# Altium PCB MainBoard.PcbDoc
Units mil, origin at the board's own origin, x right, y up, seen from the top; angles counter-clockwise.
Board outline 1113.19 x 925.2 mil, 2 copper layers (Top1, Bottom4), stack 46.457 mil thick; 29 components, 50 nets, 196 pads, 117 vias.
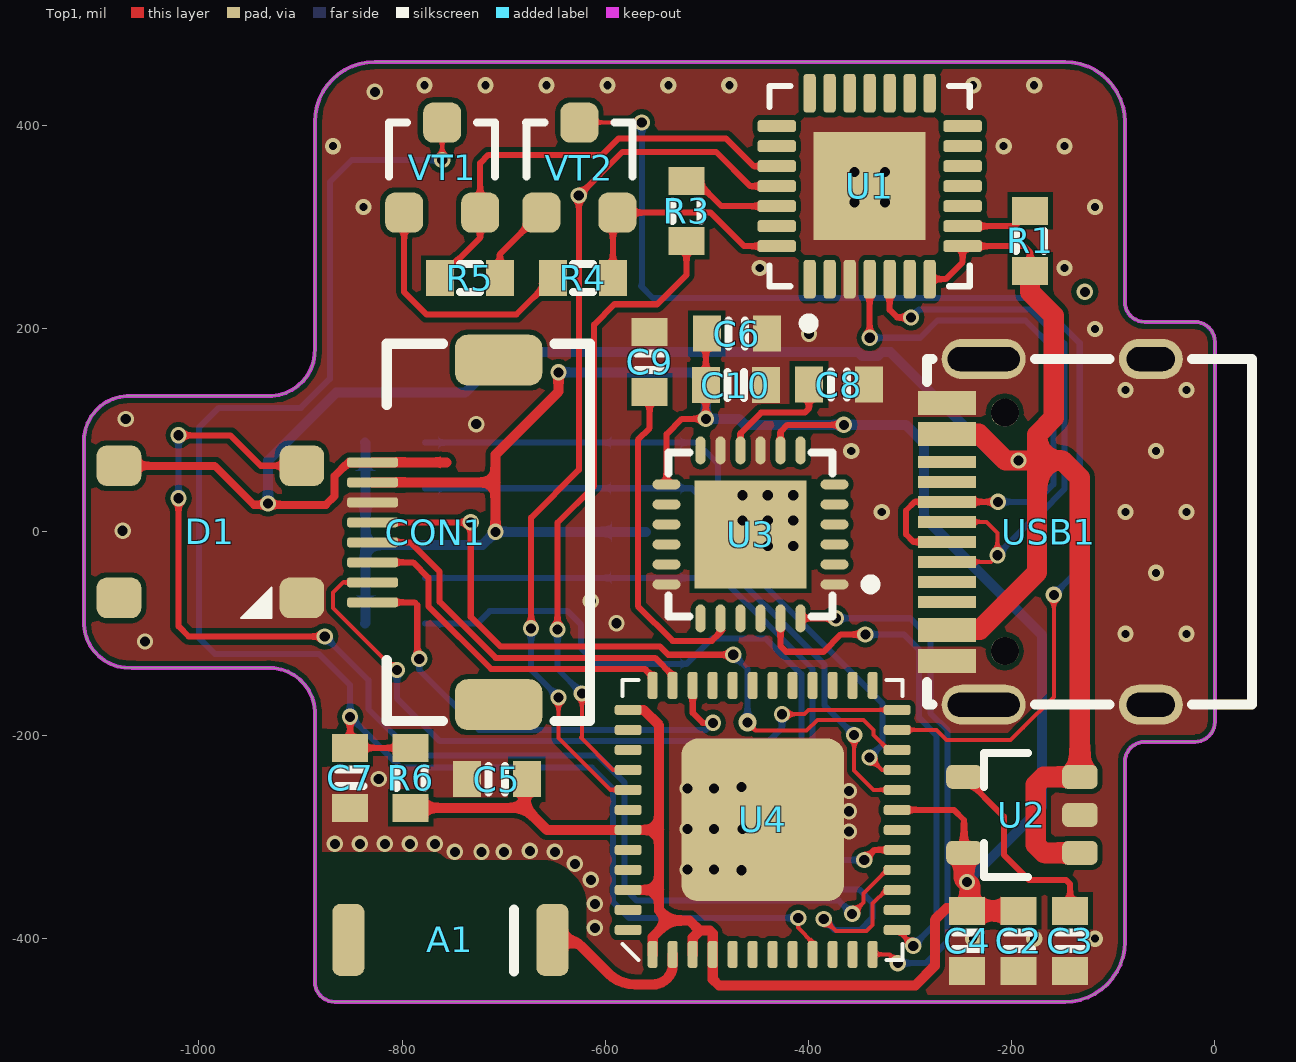
[diagram p0: Top1 view]
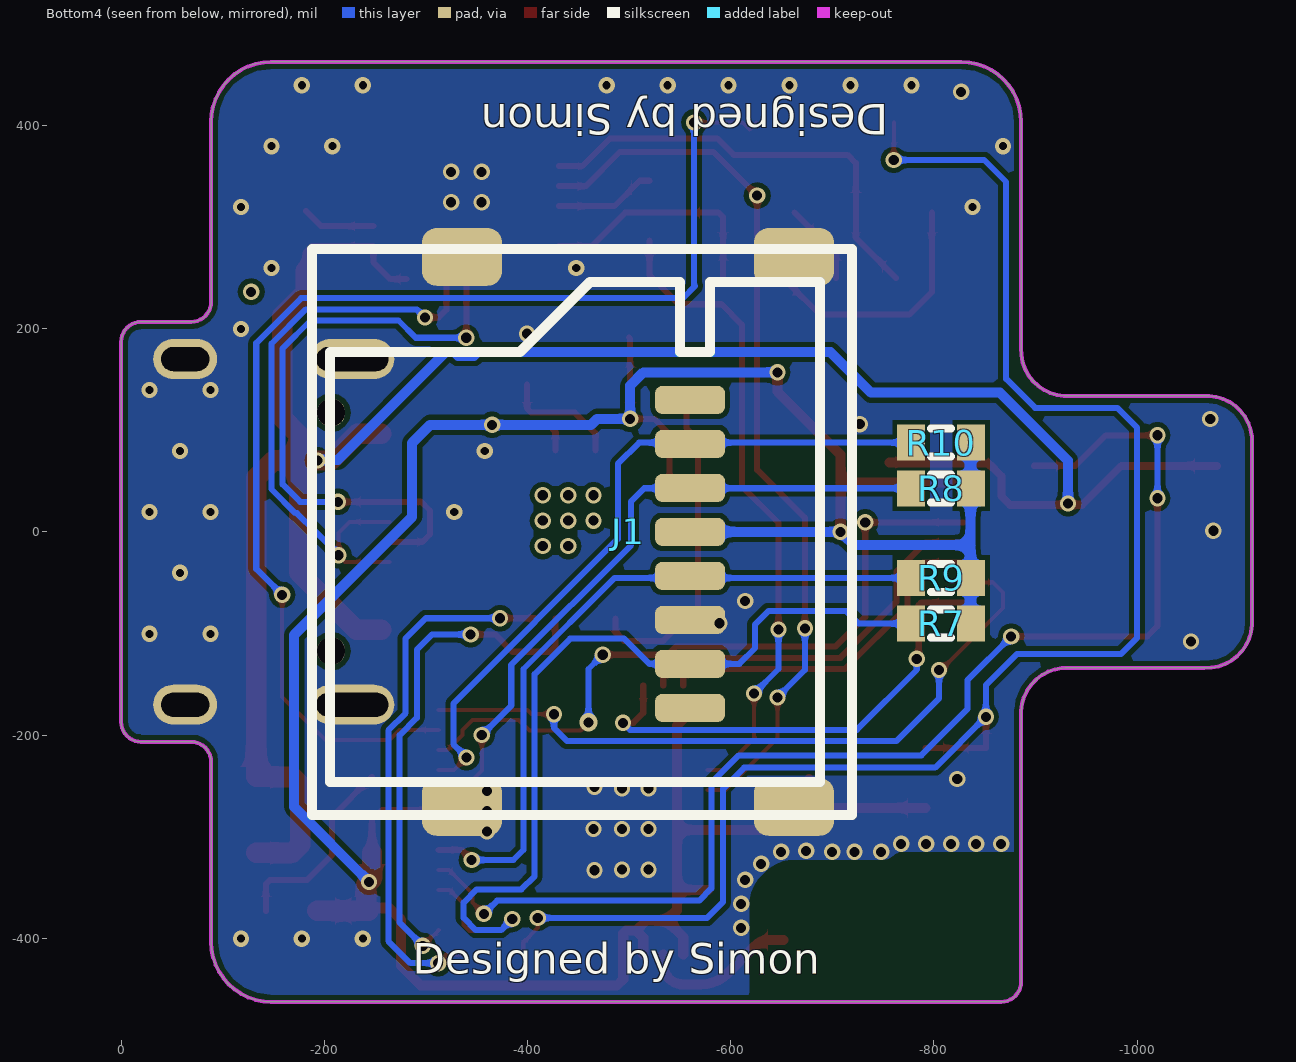
[diagram p1: Bottom4 view, seen from below]

## Layer stack, top to bottom
Top Solder: solder mask 0.3937, Solder Resist, Dk 3.5
Top1: signal copper 1.5748
Dielectric 2: core 43.3071, PP-006, Dk 4.2
Bottom4: signal copper 1.5748
Bottom Solder: solder mask 0.3937, Solder Resist, Dk 3.5

## Board outline
-933.07,-133.86 cw(c-930.61,-178.64) -885.83,-176.18 -885.83,-442.91 ccw(c-866.14,-442.91) -866.14,-462.6 -147.64,-462.6 ccw(c-147.64,-403.54) -88.58,-403.54 -88.58,-226.38 cw(c-68.9,-226.38) -68.9,-206.69 -19.68,-206.69 ccw(c-19.68,-187.01) 0,-187.01 0,187.01 ccw(c-19.68,187.01) -19.68,206.69 -68.9,206.69 cw(c-68.9,226.38) -88.58,226.38 -88.58,403.54 ccw(c-147.64,403.54) -147.64,462.6 -826.77,462.6 ccw(c-826.77,403.54) -885.83,403.54 -885.83,182.09 -885.83,181.1 cw(c-930.61,178.64) -928.15,133.86 -1070.87,133.86 ccw(c-1068.41,89.07) -1113.19,86.61 -1113.19,-91.54 ccw(c-1068.41,-89.07) -1065.94,-133.86

## Design rules (kind name [scope] priority, off if disabled: settings)
Clearance [All] p1: gap=5 ignorepadtopadclearanceinfootprint=FALSE
ComponentClearance [All] p1: gap=0 collisioncheckmode=3 verticalgap=0 showdistances=FALSE
DiffPairsRouting [All] p1: maxlimit=9 minlimit=9 mostfreqgap=9 toplayer_minwidth=4 toplayer_maxwidth=4 toplayer_prefwidth=4 bottomlayer_minwidth=4 bottomlayer_maxwidth=4 bottomlayer_prefwidth=4 maxuncoupledlength=500
FanoutControl Fanout_BGA [All] p1: bgadir=Out bgaviamode=Centered fanoutstyle=Auto fanoutdirection=Alternating viagrid=1 // Fanout_BGA (Default Rule)
HoleSize [All] p1: absolutevalues=TRUE maxlimit=10000 minlimit=8 maxpercent=80.000 minpercent=20.000
MinimumSolderMaskSliver [All] p1 off: minsoldermaskwidth=2
PlaneClearance [All] p1: clearance=8
PlaneConnect [All] p1: planeconnectstyle=Direct reliefexpansion=20 reliefentries=4 reliefconductorwidth=10 reliefairgap=10
PolygonConnect [All] p1: connectstyle=Direct reliefconductorwidth=10 reliefentries=4 polygonreliefangle="90 Angle" airgapwidth=10
RoutingVias [All] p1: holewidth=8 width=16 viastyle="Through Hole" minholewidth=6 minwidth=12 maxholewidth=28 maxwidth=50
SilkToBoardRegionClearance [All] p1 off:
SilkToSilkClearance [All] p1: silktosilkclearance=0
SilkToSolderMaskClearance [IsPad] p1: minsilkscreentomaskgap=0 clearancetoexposedcopper=TRUE
SolderMaskExpansion [All] p1: expansion=3 istentingtop=FALSE
Width [All] p1: maxlimit=10000 minlimit=4 preferedwidth=6
20 further rules are at their usual default settings.

## Components (designator, comment, footprint, x,y, rotation, side; value= is the part's Value field where it differs from the comment)
A1 "RAINSUN" ANT-Rainsun-AN5120 -751.97,-401.57 r180 top
C2 "10uF" CAP_0603 -208.17,-402.56 r90 top
C3 "10uF" CAP_0603 -157.48,-402.56 r90 top
C4 "10uF" CAP_0603 -258.86,-402.56 r90 top
C5 "0.1uF" CAP_0603 -706.69,-228.35 r0 top
C6 "103" CAP_0603 -470.47,180.18 r180 top
C7 "1uF" CAP_0603 -866.14,-242.13 r90 top
C8 "104" CAP_0603 -370,160 r0 top
C9 "2.2nF" CAP_0603 -541.34,167.32 r270 top
C10 "104" CAP_0603 -471.46,159.51 r0 top
CON1 "FFC_0.5_8" FFC_0.5_8 -740,-0.5 r90 top locked
D1 "RGB" LED_5050_WS2812B -988.62,0.04 r0 top locked
J1 "TF-Socket" TF_F -560,0 r90 bottom locked
R1 "10K" RES_0603 -196.85,286.42 r90 top
R3 "200R" RES_0603 -535,316 r90 top
R4 "12K" RES_0603 -622.05,234.76 r180 top
R5 "12K" RES_0603 -733.27,264.76 r0 top
R6 "10K" RES_0603 -776.57,-242.13 r270 top
R7 "10K" RES_0603 -807.09,-105.31 r0 bottom
R8 "10K" RES_0603 -807.09,27.87 r0 bottom
R9 "10K" RES_0603 -807.09,-60.35 r0 bottom
R10 "10K" RES_0603 -807.09,72.83 r0 bottom
U1 "CP2102" QFN-28 -339.73,340.26 r90 top value=Value
U2 "ME6211C33" SOT23-5 -191.93,-278.54 r180 top
U3 "MPU6050" QFN-24 -457,-2.5 r180 top
U4 "ESP32_SIP" QFN-48_7X7 -445,-283.5 r90 top locked
USB1 "Type-C" TypeC-304-16BCP -227.56,170.08 r90 top locked
VT1 "S8050" SMT_TRIODE_NPN -760.5,358.5 r0 top
VT2 "S8050" SMT_TRIODE_NPN -625.5,358.5 r0 top

## Footprints (in the part's own frame and the unit in brackets; to place one, negate y for a bottom-side part, rotate by r counter-clockwise, add the part's x,y. Pads: shape width x height; smd on the part's side, far side on the other; paste and mask are expansions set on the pad)
ANT-Rainsun-AN5120 [mm] "选择焊盘"
  rrect50% 0.8x1.8 smd: 1(-2.54,0) ""(2.563,0)
  silkscreen extent -1.57,-0.76 -1.57,0.79, body extent -2.57,-0.91 2.54,0.94, height 1.32
CAP_0603 [mm]
  rect 0.7x0.9 smd: 1(-0.75,-0.381) 2(0.75,-0.381)
  silkscreen extent -0.2,-0.71 0.2,-0.05, body extent -0.85,-0.86 0.85,0.09, height 0.9
FFC_0.5_8 [mil]
  rrect50% 50x86 smd: 0(-169.5,-35) 0(169.5,-35)
  rrect50% 10x50 smd: 1(-68.9,89) 2(-49.21,89) 3(-29.53,89) 4(-9.84,89) 5(9.84,89) 6(29.53,89) 7(49.21,89) 8(68.9,89)
  silkscreen extent -186,-125 186,75, body extent -187,-124 187,87, height 82
LED_5050_WS2812B [mil]
  rrect50% 44x40 smd: 1(-90,65) 2(-90,-65) 3(90,-65) 4(90,65)
  silkscreen extent 30,-85 60,-55, body extent -106,-98 106,98, height 69
QFN-24 [mm] "QFN, 24-Leads, Body 4.1x4.1mm (max), Pitch 0.50mm, IPC Low Density"
  oval 0.7x0.25 smd: 1(-2.1,1.25) 2(-2.1,0.75) 3(-2.1,0.25) 4(-2.1,-0.25) 5(-2.1,-0.75) 6(-2.1,-1.25) 13(2.1,-1.25) 14(2.1,-0.75) 15(2.1,-0.25) 16(2.1,0.25) 17(2.1,0.75) 18(2.1,1.25)
  oval 0.25x0.7 smd: 7(-1.25,-2.1) 8(-0.75,-2.1) 9(-0.25,-2.1) 10(0.25,-2.1) 11(0.75,-2.1) 12(1.25,-2.1) 19(1.25,2.1) 20(0.75,2.1) 21(0.25,2.1) 22(-0.25,2.1) 23(-0.75,2.1) 24(-1.25,2.1)
  rect 2.8x2.7 smd: ""(0,0)
  silkscreen extent -3.13,-2.05 2.05,2.05, body extent -2.02,-2.02 2.02,2.02, height 0.95
QFN-28 [mil]
  rrect50% 38x12 smd mask+5: 1(-91.5,59.06) 2(-91.5,39.37) 3(-91.5,19.69) 4(-91.5,0) 5(-91.5,-19.68) 6(-91.5,-39.37) 7(-91.5,-59.06) 15(91.5,-59.06) 16(91.5,-39.37) 17(91.5,-19.68) 18(91.5,0) 19(91.5,19.69) 20(91.5,39.37) 21(91.5,59.06)
  rrect50% 12x38 smd mask+5: 8(-59.06,-91.5) 9(-39.37,-91.5) 10(-19.69,-91.5) 11(0,-91.5) 12(19.69,-91.5) 13(39.37,-91.5) 14(59.06,-91.5) 22(59.06,91.5) 23(39.37,91.5) 24(19.69,91.5) 25(0,91.5) 26(-19.69,91.5) 27(-39.37,91.5) 28(-59.06,91.5)
  rect 106.3x110.24 smd: 29(0,0)
  silkscreen extent -140,-98 98,98, body extent -98,-98 98,98, height 35
QFN-48_7X7 [mm]
  rrect20% 4.064x4.064 smd: 0(0,0)
  rrect50% 0.675x0.25 smd: 1(-3.363,2.75) 2(-3.363,2.25) 3(-3.363,1.75) 4(-3.363,1.25) 5(-3.363,0.75) 6(-3.363,0.25) 7(-3.363,-0.25) 8(-3.363,-0.75) 9(-3.363,-1.25) 10(-3.363,-1.75) 11(-3.363,-2.25) 12(-3.363,-2.75) 25(3.363,-2.75) 26(3.363,-2.25) 27(3.363,-1.75) 28(3.363,-1.25) 29(3.363,-0.75) 30(3.363,-0.25) 31(3.363,0.25) 32(3.363,0.75) 33(3.363,1.25) 34(3.363,1.75) 35(3.363,2.25) 36(3.363,2.75)
  rrect50% 0.25x0.675 smd: 13(-2.75,-3.363) 14(-2.25,-3.363) 15(-1.75,-3.363) 16(-1.25,-3.363) 17(-0.75,-3.363) 18(-0.25,-3.363) 19(0.25,-3.363) 20(0.75,-3.363) 21(1.25,-3.363) 22(1.75,-3.363) 23(2.25,-3.363) 24(2.75,-3.363) 37(2.75,3.363) 38(2.25,3.363) 39(1.75,3.363) 40(1.25,3.363) 41(0.75,3.363) 42(0.25,3.363) 43(-0.25,3.363) 44(-0.75,3.363) 45(-1.25,3.363) 46(-1.75,3.363) 47(-2.25,3.363) 48(-2.75,3.363)
  silkscreen extent -3.5,-3.5 3.5,3.5, body extent -3.5,-3.5 3.5,3.5, height 1
RES_0603 [mm]
  rect 0.7x0.9 smd: 1(-0.75,-0.381) 2(0.75,-0.381)
  silkscreen extent -0.25,-0.73 0.25,-0.03, body extent -0.85,-0.86 0.85,0.09, height 0.9
SMT_TRIODE_NPN [mm] "Surface mount NPN transistor, package SOT-23"
  rrect50% 0.95x1 smd: 1(-0.95,-1.125) 2(0.95,-1.125) 3(0,1.125)
  silkscreen extent -1.33,-0.22 1.32,1.13, body extent -1.45,-1.4 1.45,1.4, height 1.3
SOT23-5 [mm] "SOT23, 3-Leads, Body 3.1x3.0mm (max), Pitch 0.95mm, IPC Medium Density"
  rrect50% 0.889x0.6 smd: 1(-1.5,0.95) 2(-1.5,0) 3(-1.5,-0.95) 4(1.396,-0.95) 5(1.396,0.95)
  silkscreen extent -0.2,-1.55 0.9,1.55, body extent -1.48,-1.45 1.32,1.45, height 1.2
TF_F [mm] "翻盖式"
  rrect50% 0.7x1.75 smd: 1(3.3,0) 2(2.2,0) 3(1.1,0) 4(0,0) 5(-1.1,0) 6(-2.2,0) 7(-3.3,0) 8(-4.4,0)
  rrect50% 1.45x2 smd: S1(-6.875,-2.6) S2(-6.875,5.7) S3(6.875,5.7) S4(6.875,-2.6)
  silkscreen extent -7.08,-4.05 7.08,9.45, body extent -7.19,-5.07 7.41,9.43, height 1.87
TypeC-304-16BCP [mm]
  oval 1x2.1 hole 0.6 slot 1.8 at 90 deg: 13(-8.64,0) 14(0,0)
  oval 1x1.6 hole 0.6 slot 1.2 at 90 deg: 15(-8.64,-4.18) 16(0,-4.18)
  rect 0.6x1.45 smd: A1B12(-7.545,0.915) A4B9(-6.77,0.915) B1A12(-1.1,0.915) B4A9(-1.87,0.915)
  rect 0.3x1.45 smd: A5(-5.57,0.914) A6(-4.57,0.915) A7(-4.07,0.915) A8(-3.07,0.915) B5(-2.57,0.915) B6(-3.57,0.915) B7(-5.07,0.915) B8(-6.07,0.915)
  round 0.7 hole 0.7 unplated: ""(-7.3,-0.53) ""(-1.34,-0.53)
  silkscreen extent -8.64,-6.71 0,1.42, body extent -8.77,-6.9 0.17,1, height 3.11

## Part data
A1: library part ANT-Rainsun-AP5120
C2 C3 C4 C5 C6 C7 C8 C9 C10: library part cap
CON1: "FFC", System=Connector
D1: library part RGB_4WIC, "LED", Type=5050
J1: library part TF-Socket_flip, "98 + 4_ Position Card Connector Secure Digital - microSDa?￠ Surface Mount, Right Angle Gold", Package=None, Availability=Unavailable, MF="Amphenol Commercial Products", MP=1140084168, Price=None, SnapEDA_Link=https://www.snapeda.com/parts/1140084168/Amphenol/view-part/4544529/?ref=snap
R1 R3 R4 R5 R6 R7 R8 R9 R10: library part Res
U1: "USB转TTL", MFG #1="SILICON LABS", PART DESC="SINGLE-CHIP USB TO UART BRIDGE, QFN28, RoHS.", PART NUMBER=CP2102, RefDes=RefDes, Type=DEV
U2: library part LP2992, "LDO"
U3: "六轴传感器"
U4: library part ESP32-PICO
USB1: library part Type-C母口
VT1 VT2: library part SMT_TRIODE_NPN, "Surface mount NPN transistor, package SOT-23"

## Via types
v1: diameter 16, hole 10, Top1 to Bottom4, tented both sides, 87 vias
v2: diameter 16, hole 8, Top1 to Bottom4, 29 vias
v3: diameter 18, hole 10, Top1 to Bottom4, tented both sides, 1 vias

## Nets (pads, with @x,y where several pads share a name; then routed paths per layer and width w, separated by ;. In a path a pad name is that pad's centre, name@x,y a point inside that pad or via, vN(x,y) a via of type N, cw(c..) or ccw(c..) an arc to the next point about the centre after c; other vN are vias at no path point)
3V3: C2.2 C4.2 C5.2 C6.2 C10.1 CON1.7 J1.4 R6.2 R7.1 R8.1 R9.1 R10.1 U2.5 U3.8 U3.13 U4.1 U4.3 U4.4 U4.19 U4.37 U4.43 U4.46 | length 3172.8
  Top1 w6: U3.13 -539.68,96.15 -524.61,111.22 v1(-500.98,111.22) -500.98,140.51 C10.1 -500.98,190.2 C6.2@-500,191.18 ; U3.8 -427.47,98.53 -420.68,105.32 v1(-365.16,105.32) ; U4.19 -256.85,-273.66 -246.87,-283.64 U2.5
  Top1 w10: CON1.7 -708,48.71 ; R6.2 -679.13,-271.65 ; v1(-708,0) -708,48.71 ; C5.2 -679.13,-245.31 -679.13,-271.65 ; v1(-646,157) -646,138 -708,76 -708,48.71 ; U4.46 -547,-352.4 ; U4.37 -562.27,-175.23 -547,-190.5 -547,-293.34 ; U4.1 -553.27,-398.77 -537,-382.5 ; U4.3 -513.9,-399.4 -507,-392.5 ; C4.2@-241.14,-370.31 -264.02,-370.31 -275.59,-381.89 -275.59,-427.17 -294.93,-446.5 -488,-446.5 -494.21,-440.29 U4.4 -494.21,-395.29 -497,-392.5 -507,-392.5 ; -679.13,-271.65 -657.44,-293.34 U4.43 -547,-293.34 ; -547,-352.4 -547,-372.5 -537,-382.5 ; -547,-352.4 -547,-293.34 ; -537,-382.5 -517,-382.5 -507,-392.5
  Top1 w20: U2.5 -246.87,-341.71 -241.14,-347.44 -241.14,-370.31 C4.2 C2.2
  Bottom4 w10: R7.1 -836,-89.7 -836,-13 ; R10.1 -836,87.22 -836,-13 ; v1(-646,157) -514,157 -500.98,143.98 v1(-500.98,111.22) -468.5,111.22 -462.6,105.32 v1(-365.16,105.32) -304.13,105.32 -286.42,87.6 -286.42,14.76 -170.28,-101.38 -170.28,-270.84 v1(-244.01,-344.57) ; J1.4 v1(-708,0) -721,-13 -836,-13
BH_SCL: U3.23 U4.13 | length 509.6
  Top1 w4: U4.13 v1(-296.89,-407.5)
  Top1 w6: U3.23 -427.47,-112.53 -422,-118 -385,-118 -368,-101 v1(-344,-101)
  Bottom4 w6: v1(-344,-101) -306,-101 -291,-116 -291,-183 -274,-200 -274,-384.61 v1(-296.89,-407.5)
BH_SDA: U3.24 U4.12 | length 527.9
  Top1 w4: U4.12 -320.62,-415.88 v1(-312,-424.5)
  Top1 w6: U3.24 -407.26,-84.65 -406.9,-85 v1(-373,-85)
  Bottom4 w6: v1(-373,-85) -300.55,-85 -300.2,-84.65 -280,-104.84 -280,-178.44 -263,-195.44 -263,-402.76 -284.74,-424.5 v1(-312,-424.5)
CP_Rx: U1.25 U4.41 | length 880.9
  Top1 w4: v1(-646,-163) -646,-202.97 -595,-253.97 U4.41
  Top1 w6: v1(-673,-95) -673,14 -626,61 v1(-626,331) -583,374 -491,374 -457.26,340.26 U1.25
  Bottom4 w6: v1(-673,-95) -673,-136 v1(-646,-163)
CP_Tx: R3.1 U4.40 | length 636.3
  Top1 w4: v1(-623,-159) -623,-201.5 -624,-202.5 -592.21,-234.29 U4.40
  Top1 w6: v1(-647,-96) -647,9 -611,45 -611,204 -591,224 -549,224 -520,253 R3.1
  Bottom4 w6: v1(-647,-96) -647,-135 v1(-623,-159)
DC: CON1.5 U4.22 | length 706
  Top1 w4: v3(-460,-187.5) -452,-195.5 -401.75,-195.5 -391.25,-185 -346,-185 -336,-195 -336,-200 -321.4,-214.6 U4.22
  Top1 w6: CON1.5 v1(-732.34,9.34) -732.34,-83.66 -703,-113 -546,-113 -538,-121 v1(-474,-121)
  Bottom4 w6: v1(-474,-121) -460,-135 v3(-460,-187.5)
DTR: R4.1 U1.28 VT2.2 | length 236.8
  Top1 w6: R4.1 -592.52,309.79 VT2.2 -496.21,314.21 -463.2,281.2 U1.28
EN: C7.2 R6.1 U4.9 VT1.3 | length 1625.5
  Top1 w4: v1(-760.5,366) VT1.3 ; v1(-410,-380) -410,-390 -395.79,-404.21 U4.9
  Top1 w6: v1(-851.14,-182.09) C7.2 R6.1
  Bottom4 w6: v1(-760.5,366) -849.41,366 -871.06,344.35 -871.06,150.59 -899.61,122.05 -980.51,122.05 -1000,102.56 -1000,-104.33 -984.25,-120.08 -881.89,-120.08 -851.14,-150.83 v1(-851.14,-182.09) -801.23,-232 -613.17,-232 -592.52,-252.65 -592.52,-364.17 -576.69,-380 v1(-410,-380)
FLASH_CLK: U4.31
FLASH_CS: U4.25
FLASH_SD0: U4.27
FLASH_SD1: U4.33
FLASH_SD2: U4.30
FLASH_SD3: U4.32
GND: C2.1 C3.1 C4.1 C5.1 C6.1 C7.1 C8.2 C9.1 C10.2 CON1.6 D1.3 J1.6 J1.S1 J1.S2 J1.S3 J1.S4 U1.3 U1.29 U2.2 U3.1 U3.9 U3.11 U3.18 U4.0 USB1.13 USB1.14 USB1.15 USB1.16 USB1.A1B12 USB1.B1A12
  other v1: -610.24,-389.76 -610.24,-366.14 -614.17,-342.52 -466,-333 -519,-332.5 -493,-332.5 -629.92,-326.77 -748.03,-314.96 -721.78,-314.96 -699.8,-314.96 -649.61,-314.96 -674.21,-313.98 -866.14,-307.09 -841.54,-307.09 -816.93,-307.09 -792.32,-307.09 -767.72,-307.09 -360,-295 -519,-292.5 -493,-292.5 -465,-292.5 -360,-275 -360,-255 -519,-252.5 -493,-252.5 -466,-251 -823,-243.35 -1053,-108 -589,-90 -614.17,-68 -1075,1 -727,106 -1072,111 -399.53,195 -354.8,324.33 -324.8,324.33 -354.8,354.33 -324.8,354.33 -826.77,433.07
  other v2: -237.87,-400.38 -177.87,-400.38 -117.87,-400.38 -87.87,-100.38 -27.87,-100.38 -57.87,-40.38 -327.87,19.62 -87.87,19.62 -27.87,19.62 -357.87,79.62 -57.87,79.62 -87.87,139.62 -27.87,139.62 -117.87,199.62 -447.87,259.62 -147.87,259.62 -837.87,319.62 -117.87,319.62 -867.87,379.62 -207.87,379.62 -147.87,379.62 -777.87,439.62 -717.87,439.62 -657.87,439.62 -597.87,439.62 -537.87,439.62 -477.87,439.62 -237.87,439.62 -177.87,439.62
GPIO0: U4.23 VT2.3 | length 1218.6
  Top1 w4: VT2.3 -618.71,396 -611.71,403 v1(-564,403) ; U4.23 -274.08,-194.92 -264,-205 -201.06,-205 -189.09,-193.02 -189.09,-192.97 -158.46,-162.34 v1(-158.46,-62.01)
  Bottom4 w6: v1(-564,403) -564,243 -565,242 -553,230 -177.27,230 -133,185.73 -133,-36.54 v1(-158.46,-62.01)
GPIO4: CON1.2 U4.24 | length 705.3
  Top1 w4: CON1.2 -858.21,-49.71 -868,-59.5 -868,-75 -807,-136 v1(-805,-136) ; v1(-426,-179.5) -404,-179.5 -399.73,-175.23 U4.24
  Bottom4 w6: v1(-805,-136) -805,-164 -762.99,-206.01 -439.01,-206.01 -426,-193 v1(-426,-179.5)
GPIO5: CON1.1 U4.34 | length 477.3
  Top1 w6: CON1.1 -787.6,-69.4 -785,-72 -785,-123 v1(-783,-125) ; U4.34 -513.9,-178.19 -504.09,-188 v1(-494,-188)
  Bottom4 w6: v1(-783,-125) -783,-136 -723.99,-195.01 -501.01,-195.01 v1(-494,-188)
GPIO9: U4.28
GPIO10: U4.29
GPIO12: U4.18
GPIO13: J1.3 R8.2 U4.20 | length 657
  Top1 w4: v1(-355,-200) -355,-234.97 -336,-253.97 U4.20
  Bottom4 w6: R8.2 -514.87,42.87 -502,30 -502,-13 -384,-131 -384,-171 v1(-355,-200)
GPIO14: J1.5 R9.2 U4.17 | length 688.3
  Top1 w6: v1(-345,-323) -335.03,-313.03 U4.17
  Bottom4 w6: R9.2 -485.65,-45.35 -396,-135 -396,-313 -386,-323 v1(-345,-323)
GPIO15: J1.2 R10.2 U4.21 | length 691.1
  Top1 w4: v1(-340,-222) -327.71,-234.29 U4.21
  Bottom4 w6: R10.2 -509.83,87.83 -489,67 -489,-7 -327,-169 -327,-209 v1(-340,-222)
GPIO18: CON1.4 U4.35 | length 376.7
  Top1 w6: CON1.4 -791.85,-10.34 -763,-39.19 -763,-68.77 -707.77,-124 -551,-124 -533.58,-141.42 U4.35
GPIO19: U4.38
GPIO21: U4.42
GPIO22: U4.39
GPIO23: CON1.3 U4.36 | length 347.4
  Top1 w6: CON1.3 -789.03,-30.03 -774,-45.06 -774,-73.33 -712.33,-135 -561,-135 -553.27,-142.73 U4.36
GPIO25: U4.14
GPIO26: J1.7 R7.2 U4.15 | length 894.4
  Top1 w4: v1(-385,-381) -373,-393 -343,-393 -337,-387 -337,-366 -323.4,-352.4 U4.15
  Bottom4 w6: R7.2 -726,-90.32 -713.68,-78 -637,-78 -624,-91 -624,-114.33 -608.4,-129.92 J1.7 -519.92,-129.92 -495,-105 -442,-105 -407,-140 -407,-339 -394,-352 -350,-352 -337,-365 -337,-380 -349,-392 -374,-392 v1(-385,-381)
GPIO27: D1.4 U4.16 | length 1247.2
  Top1 w4: v1(-357,-376) -346,-365 -346,-356 -322.71,-332.71 U4.16
  Top1 w6: v1(-1020,33) -1020,-93 -1010,-103 v1(-876,-103) ; v1(-1020,95) -969,95 -939.04,65.04 D1.4
  Bottom4 w6: v1(-1020,33) v1(-1020,95) ; v1(-876,-103) -833,-146 -833,-174.5 -787.5,-220 -608,-220 -581,-247 -581,-351 -569,-363 -370,-363 v1(-357,-376)
GPIO34: U4.10
GPIO35: U4.11
GPIO37: U4.6
GPIO38: U4.7
NetA1_1: A1.1 U4.2 | length 155.4
  Top1 w10: A1.1 -638.27,-401.57 cw(c-638.27,-421.74) -624.02,-407.48 -596.69,-434.8 ; -596.68,-434.82 ccw(c-570.87,-408.97) -570.87,-445.5 -553.49,-445.5 ccw(c-553.49,-425.01) -539,-439.5 ccw(c-552.08,-426.42) -533.58,-426.42 U4.2
NetC3_2: C3.2 U2.4 | length 196.5
  Top1 w6: U2.4 -207.68,-280.34 -207.68,-317.91 -183.07,-342.52 -146.65,-342.52 -142.48,-346.69 C3.2
NetC8_1: C8.1 U3.10 | length 118
  Top1 w6: U3.10 -466.84,97.16 -446.68,117.32 -403.46,117.32 -399.53,121.26 C8.1
NetC9_2: C9.2 U3.20 | length 328.3
  Top1 w6: C9.2 -556.34,102.13 -567.91,90.55 -567.91,-73.09 -533.72,-107.28 -495.2,-107.28 -486.53,-98.61 U3.20
NetR1_2: R1.2 U1.9 | length 72.6
  Top1 w6: U1.9 -196.91,300.89 R1.2
NetR3_2: R3.2 U1.26 | length 99.1
  Top1 w6: R3.2 -510.53,345.53 -485.57,320.57 U1.26
NetR4_2: R4.2 VT1.1 | length 248.5
  Top1 w6: VT1.1 -797.9,235.9 -776,214 -687.34,214 R4.2
NetR5_2: R5.2 VT2.1 | length 81.4
  Top1 w6: R5.2 -703.74,273.37 VT2.1
RTS: R5.1 U1.24 VT1.2 | length 442.7
  Top1 w6: R5.1 -723.1,289.46 VT1.2 -723.1,363 -715.1,371 -603,371 -587,387 -481,387 -453.94,359.94 U1.24
SENSOR_VN: U4.8
SENSOR_VP: U4.5
USB-PWR-DM: U1.5 USB1.A7 USB1.B7 | length 588.2
  Top1 w4: USB1.B7@-264.21,-29.53 -220.53,-29.53 v1(-214,-23) -214,-1 -224.84,9.84 USB1.A7@-264.21,9.84
  Top1 w6: U1.5 -320.05,218.43 -312.62,211 v1(-299,211)
  Bottom4 w6: v1(-299,211) -291,219 -181.83,219 -148,185.17 -148,42.09 -171.56,18.53 -172.97,18.53 -192,-0.5 v1@-214,-22.5
USB-PWR-DP: U1.4 USB1.A6 USB1.B6 | length 613.4
  Top1 w6: v1(-339.73,191) U1.4 ; USB1.A6 -296.65,-9.85 -304,-2.5 -304,21 -295.47,29.53 USB1.B6 v1(-213.47,29.53)
  Bottom4 w6: v1(-339.73,191) -290,191 -273,208 -186.38,208 -159,180.62 -159,46.64 -176.12,29.53 v1(-213.47,29.53)
VDD_5V: CON1.8 D1.1 R1.1 U1.7 U1.8 U2.1 U2.3 USB1.A4B9 USB1.B4A9 | length 2387.7
  Top1 w6: U1.7 -265.02,248.76 -248.23,265.55 U1.8 -187.7,281.2 -181.85,275.35 R1.1
  Top1 w7.87: D1.1 -984.37,65.04 -945.9,26.57 -875,26.57 -866.31,35.26 -866.31,54.95 -853.93,67.33 -830.06,67.33 CON1.8
  Top1 w10: CON1.8 -756.41,68.4
  Top1 w20: USB1.A4B9@-256.34,-96.46 -231.46,-96.46 -175,-40 -175,70.29 ; USB1.B4A9@-256.34,96.46 -232.28,96.46 -206.12,70.29 v1(-193.29,70.29) -175,70.29 ; R1.1 -181.85,235.98 -158.46,212.6 -158.46,112.2 -175,95.67 -175,70.29 ; U2.1 -168.31,-315.94 -176.18,-308.07 -176.18,-249.02 -168.31,-241.14 U2.3 -132.87,53.15 -150.02,70.29 -175,70.29
  Bottom4 w10: v1(-932,28) -932,70 -865,137 -738,137 -698,177 -351.19,177 -347.19,173 -331.68,173 -327.68,177 -319.5,177 -213.29,70.79 v1@-193.29,70.79
pads on no net: A1. CON1.0 D1.2 J1.1 J1.8 U1.1 U1.2 U1.6 U1.10 U1.11 U1.12 U1.13 U1.14 U1.15 U1.16 U1.17 U1.18 U1.19 U1.20 U1.21 U1.22 U1.23 U1.27 U3. U3.2 U3.3 U3.4 U3.5 U3.6 U3.7 U3.12 U3.14 U3.15 U3.16 U3.17 U3.19 U3.21 U3.22 U4.26 U4.44 U4.45 U4.47 U4.48 USB1. USB1.A5 USB1.A8 USB1.B5 USB1.B8
copper on no net:
  other v1: -440,-14 -415,-14 -465,11 -440,11 -415,11 -465,36 -440,36 -415,36 -127.95,236.22

## Polygon pours and split planes (outlines as drawn)
GND on Top1 "NONET_L02_P-001" (solid, remove dead copper, pour order 34): -1199.8,557.09 -1199.8,-558.07 -1133.86,-624.02 268.2,-543.8 250,506 -176.25,533.4
GND on Bottom4 "NONET_L02_P-001" (solid, remove dead copper, pour order 35): -1181.1,525.59 -1193.9,512.8 -1193.9,-513.78 135.83,-513.78 243.11,-406.5 85.63,-249.02 85.63,591.54

## Keep-outs
Keep-Out Layer:
  lines w3.94: -826.77,462.6 ccw(c-826.77,403.54) -885.83,403.54 -885.83,182.09 -885.83,181.1 cw(c-930.61,178.64) -928.15,133.86 -1070.87,133.86 ccw(c-1068.41,89.07) -1113.19,86.61 -1113.19,-91.54 ccw(c-1068.41,-89.07) -1065.94,-133.86 -933.07,-133.86 cw(c-930.61,-178.64) -885.83,-176.18 -885.83,-442.91 ccw(c-866.14,-442.91) -866.14,-462.6 -147.64,-462.6 ; -826.77,462.6 -826.77,462.6 ; -826.77,462.6 -147.64,462.6 cw(c-147.64,403.54) -88.58,403.54 ; -147.64,-462.6 ccw(c-147.64,-403.54) -88.58,-403.54 -88.58,-226.38 cw(c-68.9,-226.38) -68.9,-206.69 ; -147.64,-462.6 -147.64,-462.6 ; -88.58,226.38 ccw(c-68.9,226.38) -68.9,206.69 -19.68,206.69 cw(c-19.68,187.01) 0,187.01 0,-187.01 cw(c-19.68,-187.01) -19.68,-206.69 -68.9,-206.69 ; -88.58,226.38 -88.58,403.54 ; -88.58,226.38 -88.58,226.38 ; -88.58,403.54 -88.58,403.54 ; -68.9,-206.69 -68.9,-206.69

## Other copper
Top1:
  pour cut-out: -885.83,-462.6 -885.83,-314.96 -769.35,-314.96 cw(c-769.35,-328.4) -759.84,-318.9 ccw(c-750.34,-309.39) -750.34,-322.83 -662.37,-322.83 cw(c-662.37,-363.16) -633.86,-334.65 -629.25,-339.26 cw(c-656.13,-366.14) -618.11,-366.14 -618.11,-451.13 ccw(c-604.67,-451.13) -614.17,-460.63
Bottom4:
  pour cut-out: -885.83,-462.6 -885.83,-314.96 -769.35,-314.96 cw(c-769.35,-328.4) -759.84,-318.9 ccw(c-750.34,-309.39) -750.34,-322.83 -662.37,-322.83 cw(c-662.37,-363.16) -633.86,-334.65 -629.25,-339.26 cw(c-656.13,-366.14) -618.11,-366.14 -618.11,-451.13 ccw(c-604.67,-451.13) -614.17,-460.63

## Silkscreen, mask and mechanical layers (free items; w line width, h text height)
Bottom Overlay:
  text "Designed by Simon" at -822,1270 h30 r180
  text "Designed by Simon" at -755,421 h30 r180
  text "Designed by Simon" at -287,-435 h30
Mechanical 1:
  lines w9.84: -1113.19,-91.54 ccw(c-1068.41,-89.07) -1065.94,-133.86 ; -1113.19,86.61 cw(c-1068.41,89.07) -1070.87,133.86 ; -933.07,-133.86 cw(c-930.61,-178.64) -885.83,-176.18 ; -928.15,133.86 ccw(c-930.61,178.64) -885.83,181.1
  lines w10: -1113.19,-91.54 -1113.19,86.61 ; -1071.85,133.86 -928.15,133.86 ; -1065.94,-133.86 -933.07,-133.86 ; -885.83,-177.17 -885.83,-442.91 ccw(c-866.14,-442.91) -866.14,-462.6 -147.64,-462.6 ccw(c-147.64,-403.54) -88.58,-403.54 -88.58,-226.38 cw(c-68.9,-226.38) -68.9,-206.69 -19.68,-206.69 ccw(c-19.68,-187.01) 0,-187.01 0,187.01 ccw(c-19.68,187.01) -19.68,206.69 -68.9,206.69 cw(c-68.9,226.38) -88.58,226.38 -88.58,403.54 ccw(c-147.64,403.54) -147.64,462.6 -826.77,462.6 ccw(c-826.77,403.54) -885.83,403.54 -885.83,182.09